# Altium PCB XC Tail Lights.PcbDoc
Units mm, origin at the board's own origin, x right, y up, seen from the top; angles counter-clockwise.
Board outline 152.4 x 101.6 mm, 2 copper layers (Top Layer, Bottom Layer); 84 components, 0 nets, 336 pads, 0 vias.
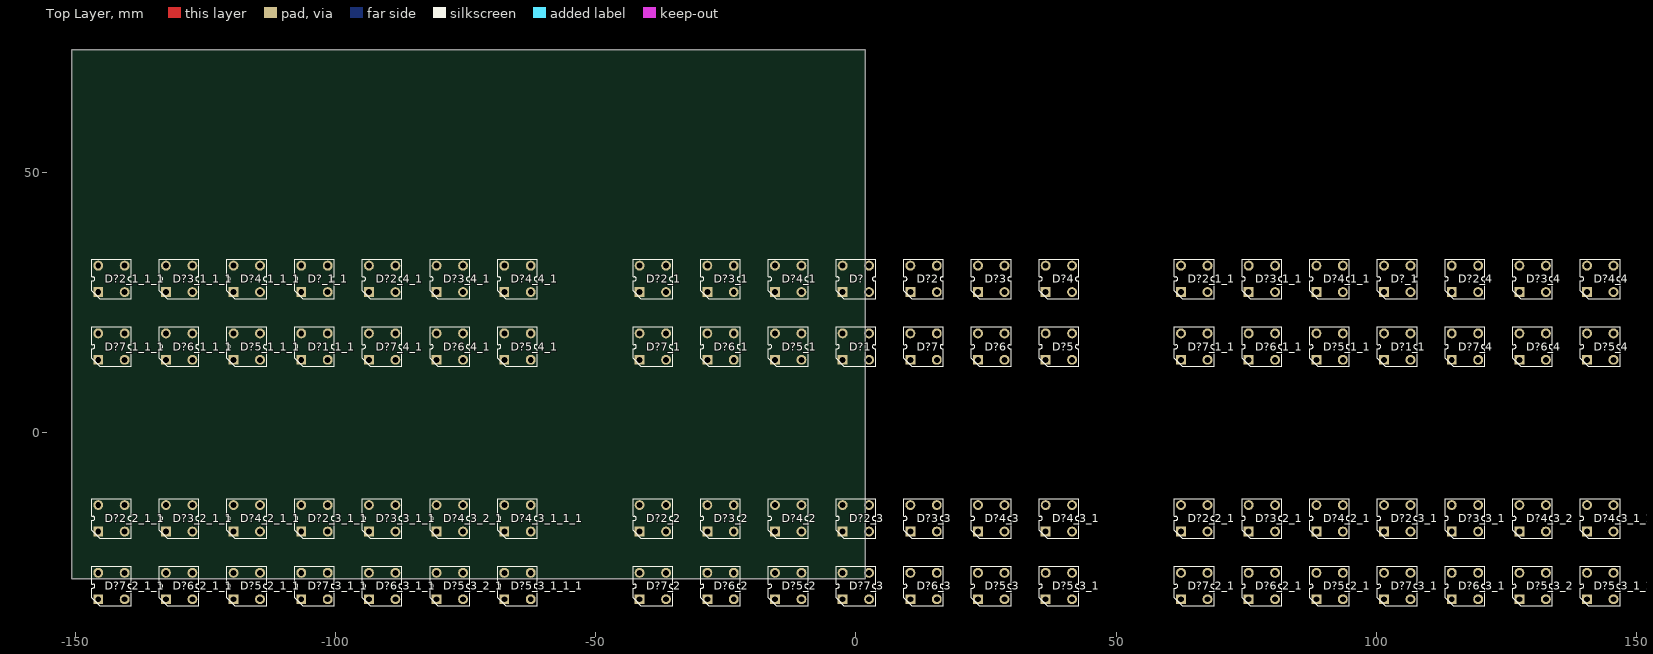
[diagram p0: Top Layer view]
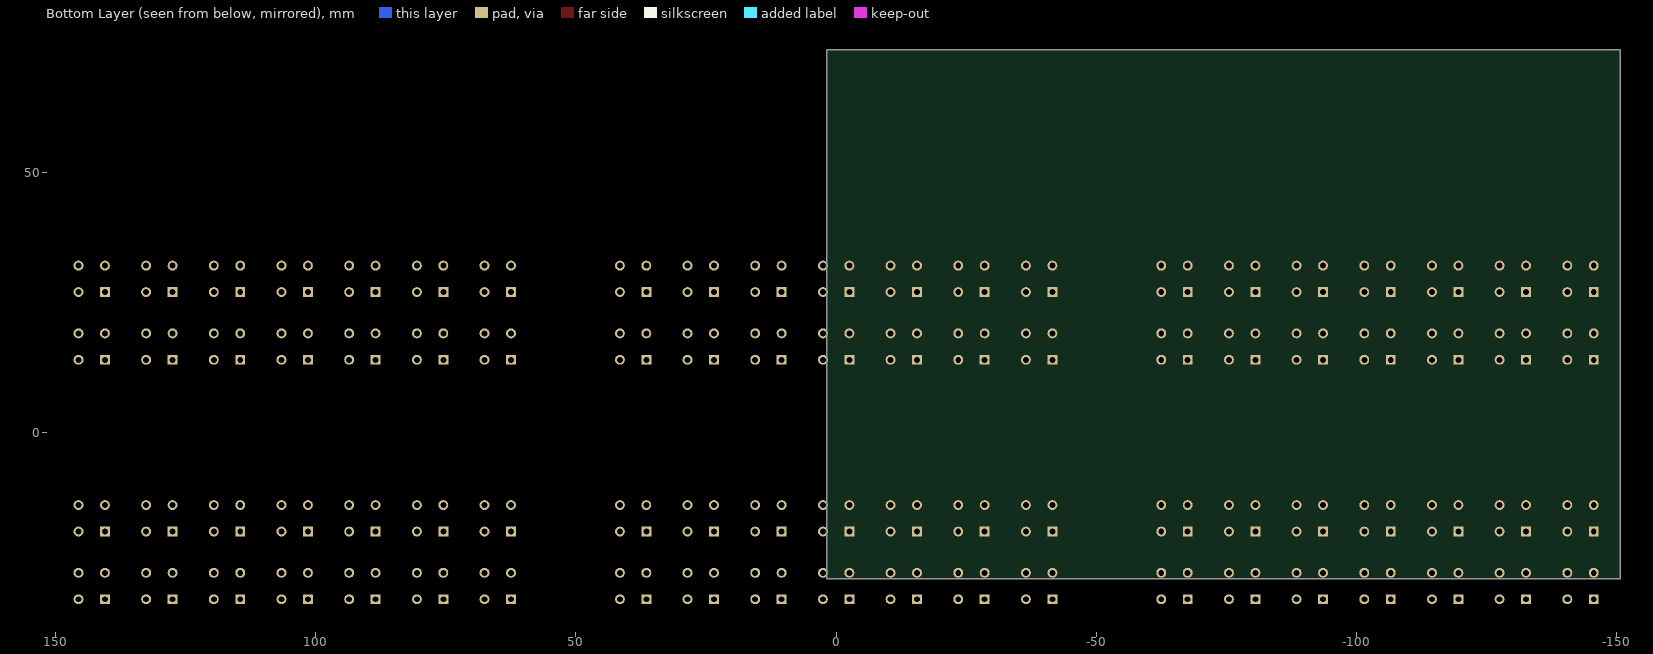
[diagram p1: Bottom Layer view, seen from below]

## Layer stack, top to bottom
Top Solder: solder mask 0.0102, Solder Resist, Dk 3.5
Top Layer: signal copper 0.0356
Dielectric 1: dielectric 0.32, FR-4, Dk 4.8
Bottom Layer: signal copper 0.0356
Bottom Solder: solder mask 0.0102, Solder Resist, Dk 3.5

## Board outline
-150.606,-28.106 1.794,-28.106 1.794,73.494 -150.606,73.494

## Design rules (kind name [scope] priority, off if disabled: settings)
Clearance [All] p1: gap=0.254
PolygonConnect [All] p1: connectstyle=Relief reliefconductorwidth=0.254 reliefentries=4 polygonreliefangle="90 Angle" airgapwidth=0.254
RoutingVias [All] p1: holewidth=0.711 width=1.27 viastyle="Through Hole" minholewidth=0.711 minwidth=1.27 maxholewidth=0.711 maxwidth=1.27
SolderMaskExpansion [All] p1: expansion=0.102
Width [All] p1: maxlimit=0.254 minlimit=0.254 preferedwidth=0.254
30 further rules are at their usual default settings.

## Components (designator, comment, footprint, x,y, rotation, side; value= is the part's Value field where it differs from the comment)
D? "AMBER" "CREE P4 YELLOW" 0,29.5 r90 top (schematic designator D11)
D?1 "AMBER" "CREE P4 YELLOW" 0,16.5 r90 top (schematic designator D11)
D?1_1 "AMBER" "CREE P4 YELLOW" 104,16.5 r90 top (schematic designator D11)
D?1_1_1 "AMBER" "CREE P4 YELLOW" -104,16.5 r90 top (schematic designator D11)
D?2 "AMBER" "CREE P4 YELLOW" 13,29.5 r90 top (schematic designator D11)
D?2_1 "AMBER" "CREE P4 YELLOW" -39,29.5 r90 top (schematic designator D11)
D?2_1_1 "AMBER" "CREE P4 YELLOW" 65,29.5 r90 top (schematic designator D11)
D?2_1_1_1 "AMBER" "CREE P4 YELLOW" -143,29.5 r90 top (schematic designator D11)
D?2_2 "AMBER" "CREE P4 YELLOW" -39,-16.5 r90 top (schematic designator D11)
D?2_2_1 "AMBER" "CREE P4 YELLOW" 65,-16.5 r90 top (schematic designator D11)
D?2_2_1_1 "AMBER" "CREE P4 YELLOW" -143,-16.5 r90 top (schematic designator D11)
D?2_3 "AMBER" "CREE P4 YELLOW" 0,-16.5 r90 top (schematic designator D11)
D?2_3_1 "AMBER" "CREE P4 YELLOW" 104,-16.5 r90 top (schematic designator D11)
D?2_3_1_1 "AMBER" "CREE P4 YELLOW" -104,-16.5 r90 top (schematic designator D11)
D?2_4 "AMBER" "CREE P4 YELLOW" 117,29.5 r90 top (schematic designator D11)
D?2_4_1 "AMBER" "CREE P4 YELLOW" -91,29.5 r90 top (schematic designator D11)
D?3 "AMBER" "CREE P4 YELLOW" 26,29.5 r90 top (schematic designator D11)
D?3_1 "AMBER" "CREE P4 YELLOW" -26,29.5 r90 top (schematic designator D11)
D?3_1_1 "AMBER" "CREE P4 YELLOW" 78,29.5 r90 top (schematic designator D11)
D?3_1_1_1 "AMBER" "CREE P4 YELLOW" -130,29.5 r90 top (schematic designator D11)
D?3_2 "AMBER" "CREE P4 YELLOW" -26,-16.5 r90 top (schematic designator D11)
D?3_2_1 "AMBER" "CREE P4 YELLOW" 78,-16.5 r90 top (schematic designator D11)
D?3_2_1_1 "AMBER" "CREE P4 YELLOW" -130,-16.5 r90 top (schematic designator D11)
D?3_3 "AMBER" "CREE P4 YELLOW" 13,-16.5 r90 top (schematic designator D11)
D?3_3_1 "AMBER" "CREE P4 YELLOW" 117,-16.5 r90 top (schematic designator D11)
D?3_3_1_1 "AMBER" "CREE P4 YELLOW" -91,-16.5 r90 top (schematic designator D11)
D?3_4 "AMBER" "CREE P4 YELLOW" 130,29.5 r90 top (schematic designator D11)
D?3_4_1 "AMBER" "CREE P4 YELLOW" -78,29.5 r90 top (schematic designator D11)
D?4 "AMBER" "CREE P4 YELLOW" 39,29.5 r90 top (schematic designator D11)
D?4_1 "AMBER" "CREE P4 YELLOW" -13,29.5 r90 top (schematic designator D11)
D?4_1_1 "AMBER" "CREE P4 YELLOW" 91,29.5 r90 top (schematic designator D11)
D?4_1_1_1 "AMBER" "CREE P4 YELLOW" -117,29.5 r90 top (schematic designator D11)
D?4_2 "AMBER" "CREE P4 YELLOW" -13,-16.5 r90 top (schematic designator D11)
D?4_2_1 "AMBER" "CREE P4 YELLOW" 91,-16.5 r90 top (schematic designator D11)
D?4_2_1_1 "AMBER" "CREE P4 YELLOW" -117,-16.5 r90 top (schematic designator D11)
D?4_3 "AMBER" "CREE P4 YELLOW" 26,-16.5 r90 top (schematic designator D11)
D?4_3_1 "AMBER" "CREE P4 YELLOW" 39,-16.5 r90 top (schematic designator D11)
D?4_3_1_1 "AMBER" "CREE P4 YELLOW" 143,-16.5 r90 top (schematic designator D11)
D?4_3_1_1_1 "AMBER" "CREE P4 YELLOW" -65,-16.5 r90 top (schematic designator D11)
D?4_3_2 "AMBER" "CREE P4 YELLOW" 130,-16.5 r90 top (schematic designator D11)
D?4_3_2_1 "AMBER" "CREE P4 YELLOW" -78,-16.5 r90 top (schematic designator D11)
D?4_4 "AMBER" "CREE P4 YELLOW" 143,29.5 r90 top (schematic designator D11)
D?4_4_1 "AMBER" "CREE P4 YELLOW" -65,29.5 r90 top (schematic designator D11)
D?5 "AMBER" "CREE P4 YELLOW" 39,16.5 r90 top (schematic designator D11)
D?5_1 "AMBER" "CREE P4 YELLOW" -13,16.5 r90 top (schematic designator D11)
D?5_1_1 "AMBER" "CREE P4 YELLOW" 91,16.5 r90 top (schematic designator D11)
D?5_1_1_1 "AMBER" "CREE P4 YELLOW" -117,16.5 r90 top (schematic designator D11)
D?5_2 "AMBER" "CREE P4 YELLOW" -13,-29.5 r90 top (schematic designator D11)
D?5_2_1 "AMBER" "CREE P4 YELLOW" 91,-29.5 r90 top (schematic designator D11)
D?5_2_1_1 "AMBER" "CREE P4 YELLOW" -117,-29.5 r90 top (schematic designator D11)
D?5_3 "AMBER" "CREE P4 YELLOW" 26,-29.5 r90 top (schematic designator D11)
D?5_3_1 "AMBER" "CREE P4 YELLOW" 39,-29.5 r90 top (schematic designator D11)
D?5_3_1_1 "AMBER" "CREE P4 YELLOW" 143,-29.5 r90 top (schematic designator D11)
D?5_3_1_1_1 "AMBER" "CREE P4 YELLOW" -65,-29.5 r90 top (schematic designator D11)
D?5_3_2 "AMBER" "CREE P4 YELLOW" 130,-29.5 r90 top (schematic designator D11)
D?5_3_2_1 "AMBER" "CREE P4 YELLOW" -78,-29.5 r90 top (schematic designator D11)
D?5_4 "AMBER" "CREE P4 YELLOW" 143,16.5 r90 top (schematic designator D11)
D?5_4_1 "AMBER" "CREE P4 YELLOW" -65,16.5 r90 top (schematic designator D11)
D?6 "AMBER" "CREE P4 YELLOW" 26,16.5 r90 top (schematic designator D11)
D?6_1 "AMBER" "CREE P4 YELLOW" -26,16.5 r90 top (schematic designator D11)
D?6_1_1 "AMBER" "CREE P4 YELLOW" 78,16.5 r90 top (schematic designator D11)
D?6_1_1_1 "AMBER" "CREE P4 YELLOW" -130,16.5 r90 top (schematic designator D11)
D?6_2 "AMBER" "CREE P4 YELLOW" -26,-29.5 r90 top (schematic designator D11)
D?6_2_1 "AMBER" "CREE P4 YELLOW" 78,-29.5 r90 top (schematic designator D11)
D?6_2_1_1 "AMBER" "CREE P4 YELLOW" -130,-29.5 r90 top (schematic designator D11)
D?6_3 "AMBER" "CREE P4 YELLOW" 13,-29.5 r90 top (schematic designator D11)
D?6_3_1 "AMBER" "CREE P4 YELLOW" 117,-29.5 r90 top (schematic designator D11)
D?6_3_1_1 "AMBER" "CREE P4 YELLOW" -91,-29.5 r90 top (schematic designator D11)
D?6_4 "AMBER" "CREE P4 YELLOW" 130,16.5 r90 top (schematic designator D11)
D?6_4_1 "AMBER" "CREE P4 YELLOW" -78,16.5 r90 top (schematic designator D11)
D?7 "AMBER" "CREE P4 YELLOW" 13,16.5 r90 top (schematic designator D11)
D?7_1 "AMBER" "CREE P4 YELLOW" -39,16.5 r90 top (schematic designator D11)
D?7_1_1 "AMBER" "CREE P4 YELLOW" 65,16.5 r90 top (schematic designator D11)
D?7_1_1_1 "AMBER" "CREE P4 YELLOW" -143,16.5 r90 top (schematic designator D11)
D?7_2 "AMBER" "CREE P4 YELLOW" -39,-29.5 r90 top (schematic designator D11)
D?7_2_1 "AMBER" "CREE P4 YELLOW" 65,-29.5 r90 top (schematic designator D11)
D?7_2_1_1 "AMBER" "CREE P4 YELLOW" -143,-29.5 r90 top (schematic designator D11)
D?7_3 "AMBER" "CREE P4 YELLOW" 0,-29.5 r90 top (schematic designator D11)
D?7_3_1 "AMBER" "CREE P4 YELLOW" 104,-29.5 r90 top (schematic designator D11)
D?7_3_1_1 "AMBER" "CREE P4 YELLOW" -104,-29.5 r90 top (schematic designator D11)
D?7_4 "AMBER" "CREE P4 YELLOW" 117,16.5 r90 top (schematic designator D11)
D?7_4_1 "AMBER" "CREE P4 YELLOW" -91,16.5 r90 top (schematic designator D11)
D?_1 "AMBER" "CREE P4 YELLOW" 104,29.5 r90 top (schematic designator D11)
D?_1_1 "AMBER" "CREE P4 YELLOW" -104,29.5 r90 top (schematic designator D11)

## Footprints (in the part's own frame and the unit in brackets; to place one, negate y for a bottom-side part, rotate by r counter-clockwise, add the part's x,y. Pads: shape width x height; smd on the part's side, far side on the other; paste and mask are expansions set on the pad)
"CREE P4 YELLOW" [mil] "CREE P4 YELLOW"
  rect 75x75 hole 45: 1(-100,100)
  round 75 hole 45: 2(-100,-100) 3(100,-100) 4(100,100)
  silkscreen extent -150,-150 150,150, body extent -150,-150 150,150, height 272

## Part data
D? D?1 D?1_1 D?1_1_1 D?2 D?2_1 D?2_1_1 D?2_1_1_1 D?2_2 D?2_2_1 D?2_2_1_1 D?2_3 D?2_3_1 D?2_3_1_1 D?2_4 D?2_4_1 D?3 D?3_1 D?3_1_1 D?3_1_1_1 D?3_2 D?3_2_1 D?3_2_1_1 D?3_3 D?3_3_1 D?3_3_1_1 D?3_4 D?3_4_1 D?4 D?4_1 D?4_1_1 D?4_1_1_1 D?4_2 D?4_2_1 D?4_2_1_1 D?4_3 D?4_3_1 D?4_3_1_1 D?4_3_1_1_1 D?4_3_2 D?4_3_2_1 D?4_4 D?4_4_1 D?5 D?5_1 D?5_1_1 D?5_1_1_1 D?5_2 D?5_2_1 D?5_2_1_1 D?5_3 D?5_3_1 D?5_3_1_1 D?5_3_1_1_1 D?5_3_2 D?5_3_2_1 D?5_4 D?5_4_1 D?6 D?6_1 D?6_1_1 D?6_1_1_1 D?6_2 D?6_2_1 D?6_2_1_1 D?6_3 D?6_3_1 D?6_3_1_1 D?6_4 D?6_4_1 D?7 D?7_1 D?7_1_1 D?7_1_1_1 D?7_2 D?7_2_1 D?7_2_1_1 D?7_3 D?7_3_1 D?7_3_1_1 D?7_4 D?7_4_1 D?_1 D?_1_1: library part CP41B-AFSCM0Q0264, "CREE AMBER LED P4 (SUPERFLUX)"

## Nets (pads, with @x,y where several pads share a name; then routed paths per layer and width w, separated by ;. In a path a pad name is that pad's centre, name@x,y a point inside that pad or via, vN(x,y) a via of type N, cw(c..) or ccw(c..) an arc to the next point about the centre after c; other vN are vias at no path point)
pads on no net: D?1.1 D?1.2 D?1.3 D?1.4 D?1_1.1 D?1_1.2 D?1_1.3 D?1_1.4 D?1_1_1.1 D?1_1_1.2 D?1_1_1.3 D?1_1_1.4 D?2.1 D?2.2 D?2.3 D?2.4 D?2_1.1 D?2_1.2 D?2_1.3 D?2_1.4 D?2_1_1.1 D?2_1_1.2 D?2_1_1.3 D?2_1_1.4 D?2_1_1_1.1 D?2_1_1_1.2 D?2_1_1_1.3 D?2_1_1_1.4 D?2_2.1 D?2_2.2 D?2_2.3 D?2_2.4 D?2_2_1.1 D?2_2_1.2 D?2_2_1.3 D?2_2_1.4 D?2_2_1_1.1 D?2_2_1_1.2 D?2_2_1_1.3 D?2_2_1_1.4 D?2_3.1 D?2_3.2 D?2_3.3 D?2_3.4 D?2_3_1.1 D?2_3_1.2 D?2_3_1.3 D?2_3_1.4 D?2_3_1_1.1 D?2_3_1_1.2 D?2_3_1_1.3 D?2_3_1_1.4 D?2_4.1 D?2_4.2 D?2_4.3 D?2_4.4 D?2_4_1.1 D?2_4_1.2 D?2_4_1.3 D?2_4_1.4 D?3.1 D?3.2 D?3.3 D?3.4 D?3_1.1 D?3_1.2 D?3_1.3 D?3_1.4 D?3_1_1.1 D?3_1_1.2 D?3_1_1.3 D?3_1_1.4 D?3_1_1_1.1 D?3_1_1_1.2 D?3_1_1_1.3 D?3_1_1_1.4 D?3_2.1 D?3_2.2 D?3_2.3 D?3_2.4 D?3_2_1.1 D?3_2_1.2 D?3_2_1.3 D?3_2_1.4 D?3_2_1_1.1 D?3_2_1_1.2 D?3_2_1_1.3 D?3_2_1_1.4 D?3_3.1 D?3_3.2 D?3_3.3 D?3_3.4 D?3_3_1.1 D?3_3_1.2 D?3_3_1.3 D?3_3_1.4 D?3_3_1_1.1 D?3_3_1_1.2 D?3_3_1_1.3 D?3_3_1_1.4 D?3_4.1 D?3_4.2 D?3_4.3 D?3_4.4 D?3_4_1.1 D?3_4_1.2 D?3_4_1.3 D?3_4_1.4 D?4.1 D?4.2 D?4.3 D?4.4 D?4_1.1 D?4_1.2 D?4_1.3 D?4_1.4 D?4_1_1.1 D?4_1_1.2 D?4_1_1.3 D?4_1_1.4 D?4_1_1_1.1 D?4_1_1_1.2 D?4_1_1_1.3 D?4_1_1_1.4 D?4_2.1 D?4_2.2 D?4_2.3 D?4_2.4 D?4_2_1.1 D?4_2_1.2 D?4_2_1.3 D?4_2_1.4 D?4_2_1_1.1 D?4_2_1_1.2 D?4_2_1_1.3 D?4_2_1_1.4 D?4_3.1 D?4_3.2 D?4_3.3 D?4_3.4 D?4_3_1.1 D?4_3_1.2 D?4_3_1.3 D?4_3_1.4 D?4_3_1_1.1 D?4_3_1_1.2 D?4_3_1_1.3 D?4_3_1_1.4 D?4_3_1_1_1.1 D?4_3_1_1_1.2 D?4_3_1_1_1.3 D?4_3_1_1_1.4 D?4_3_2.1 D?4_3_2.2 D?4_3_2.3 D?4_3_2.4 D?4_3_2_1.1 D?4_3_2_1.2 D?4_3_2_1.3 D?4_3_2_1.4 D?4_4.1 D?4_4.2 D?4_4.3 D?4_4.4 D?4_4_1.1 D?4_4_1.2 D?4_4_1.3 D?4_4_1.4 D?5.1 D?5.2 D?5.3 D?5.4 D?5_1.1 D?5_1.2 D?5_1.3 D?5_1.4 D?5_1_1.1 D?5_1_1.2 D?5_1_1.3 D?5_1_1.4 D?5_1_1_1.1 D?5_1_1_1.2 D?5_1_1_1.3 D?5_1_1_1.4 D?5_2.1 D?5_2.2 D?5_2.3 D?5_2.4 D?5_2_1.1 D?5_2_1.2 D?5_2_1.3 D?5_2_1.4 D?5_2_1_1.1 D?5_2_1_1.2 D?5_2_1_1.3 D?5_2_1_1.4 D?5_3.1 D?5_3.2 D?5_3.3 D?5_3.4 D?5_3_1.1 D?5_3_1.2 D?5_3_1.3 D?5_3_1.4 D?5_3_1_1.1 D?5_3_1_1.2 D?5_3_1_1.3 D?5_3_1_1.4 D?5_3_1_1_1.1 D?5_3_1_1_1.2 D?5_3_1_1_1.3 D?5_3_1_1_1.4 D?5_3_2.1 D?5_3_2.2 D?5_3_2.3 D?5_3_2.4 D?5_3_2_1.1 D?5_3_2_1.2 D?5_3_2_1.3 D?5_3_2_1.4 D?5_4.1 D?5_4.2 D?5_4.3 D?5_4.4 D?5_4_1.1 D?5_4_1.2 D?5_4_1.3 D?5_4_1.4 D?6.1 D?6.2 D?6.3 D?6.4 D?6_1.1 D?6_1.2 D?6_1.3 D?6_1.4 D?6_1_1.1 D?6_1_1.2 D?6_1_1.3 D?6_1_1.4 D?6_1_1_1.1 D?6_1_1_1.2 D?6_1_1_1.3 D?6_1_1_1.4 D?6_2.1 D?6_2.2 D?6_2.3 D?6_2.4 D?6_2_1.1 D?6_2_1.2 D?6_2_1.3 D?6_2_1.4 D?6_2_1_1.1 D?6_2_1_1.2 D?6_2_1_1.3 D?6_2_1_1.4 D?6_3.1 D?6_3.2 D?6_3.3 D?6_3.4 D?6_3_1.1 D?6_3_1.2 D?6_3_1.3 D?6_3_1.4 D?6_3_1_1.1 D?6_3_1_1.2 D?6_3_1_1.3 D?6_3_1_1.4 D?6_4.1 D?6_4.2 D?6_4.3 D?6_4.4 D?6_4_1.1 D?6_4_1.2 D?6_4_1.3 D?6_4_1.4 D?7.1 D?7.2 D?7.3 D?7.4 D?7_1.1 D?7_1.2 D?7_1.3 D?7_1.4 D?7_1_1.1 D?7_1_1.2 D?7_1_1.3 D?7_1_1.4 D?7_1_1_1.1 D?7_1_1_1.2 D?7_1_1_1.3 D?7_1_1_1.4 D?7_2.1 D?7_2.2 D?7_2.3 D?7_2.4 D?7_2_1.1 D?7_2_1.2 D?7_2_1.3 D?7_2_1.4 D?7_2_1_1.1 D?7_2_1_1.2 D?7_2_1_1.3 D?7_2_1_1.4 D?7_3.1 D?7_3.2 D?7_3.3 D?7_3.4 D?7_3_1.1 D?7_3_1.2 D?7_3_1.3 D?7_3_1.4 D?7_3_1_1.1 D?7_3_1_1.2 D?7_3_1_1.3 D?7_3_1_1.4 D?7_4.1 D?7_4.2 D?7_4.3 D?7_4.4 D?7_4_1.1 D?7_4_1.2 D?7_4_1.3 D?7_4_1.4 D?.1 D?.2 D?.3 D?.4 D?_1.1 D?_1.2 D?_1.3 D?_1.4 D?_1_1.1 D?_1_1.2 D?_1_1.3 D?_1_1.4

## Silkscreen, mask and mechanical layers (free items; w line width, h text height)
Mechanical 1:
  drawing of 192 lines, arcs and shapes, not listed
Mechanical 2:
  drawing of 212 lines, arcs and shapes, not listed
Mechanical 3:
  lines w0.2: -158.415,25 -148.415,25 -148.415,38 ; 0,0 0,15 ; -147,34 cw(c-145,34) -145,36 -63,36 cw(c-63,34) -61,34 -61,33.5 -61,9.5 cw(c-63,9.5) -63,7.5 ccw(c-63,0) -63,-7.5 cw(c-63,-9.5) -61,-9.5 -61,-34 cw(c-63,-34) -63,-36 -145,-36 cw(c-145,-34) -147,-34 -147,-33.5 -147,-9.5 cw(c-145,-9.5) -145,-7.5 ccw(c-145,0) -145,7.5 cw(c-145,9.5) -147,9.5 -147,34 ; -147,34 -147,34 ; -43,34 cw(c-41,34) -41,36 41,36 cw(c41,34) 43,34 43,33.5 43,9.5 cw(c41,9.5) 41,7.5 ccw(c41,0) 41,-7.5 cw(c41,-9.5) 43,-9.5 43,-34 cw(c41,-34) 41,-36 -41,-36 cw(c-41,-34) -43,-34 -43,-33.5 -43,-9.5 cw(c-41,-9.5) -41,-7.5 ccw(c-41,0) -41,7.5 cw(c-41,9.5) -43,9.5 -43,34 ; -43,34 -43,34 ; 61,34 cw(c63,34) 63,36 145,36 cw(c145,34) 147,34 147,33.5 147,9.5 cw(c145,9.5) 145,7.5 ccw(c145,0) 145,-7.5 cw(c145,-9.5) 147,-9.5 147,-34 cw(c145,-34) 145,-36 63,-36 cw(c63,-34) 61,-34 61,-33.5 61,-9.5 cw(c63,-9.5) 63,-7.5 ccw(c63,0) 63,7.5 cw(c63,9.5) 61,9.5 61,34 ; 61,34 61,34
Mechanical 10:
  circle w0.1: c42.5,0 r5
  circle w0.1: c-42.5,0 r5
  circle w0.2: c-25,0 r1.5
  circle w0.2: c-25,0 r3
  circle w0.2: c25,0 r3
  circle w0.2: c25,0 r1.5
  circle w0.2: c-32.5,23 r3
  circle w0.2: c-32.5,23 r1.5
  circle w0.2: c32.5,23 r1.5
  circle w0.2: c32.5,23 r3
  circle w0.2: c32.5,-23 r1.5
  circle w0.2: c32.5,-23 r3
  circle w0.2: c-32.5,-23 r1.5
  circle w0.2: c-32.5,-23 r3
  lines w0.013: -48.5,0 0,0 -42.5,0
  lines w0.2: -147,-16 -147,19 ; -147,-9.5 -147,-34 ccw(c-145,-34) -145,-36 0,-36 145,-36 ccw(c145,-34) 147,-34 147,-9.5 ; -147,9.5 -147,33.5 -147,34 cw(c-145,34) -145,36 0,36 145,36 cw(c145,34) 147,34 147,33.5 147,9.5 ; 147,-20 147,18